# Altium PCB PCB1.PcbDoc
Units mm, origin at the board's own origin, x right, y up, seen from the top; angles counter-clockwise.
Board outline 100 x 50 mm, 2 copper layers (Top Layer, Bottom Layer); 29 components, 29 nets, 93 pads, 32 vias.
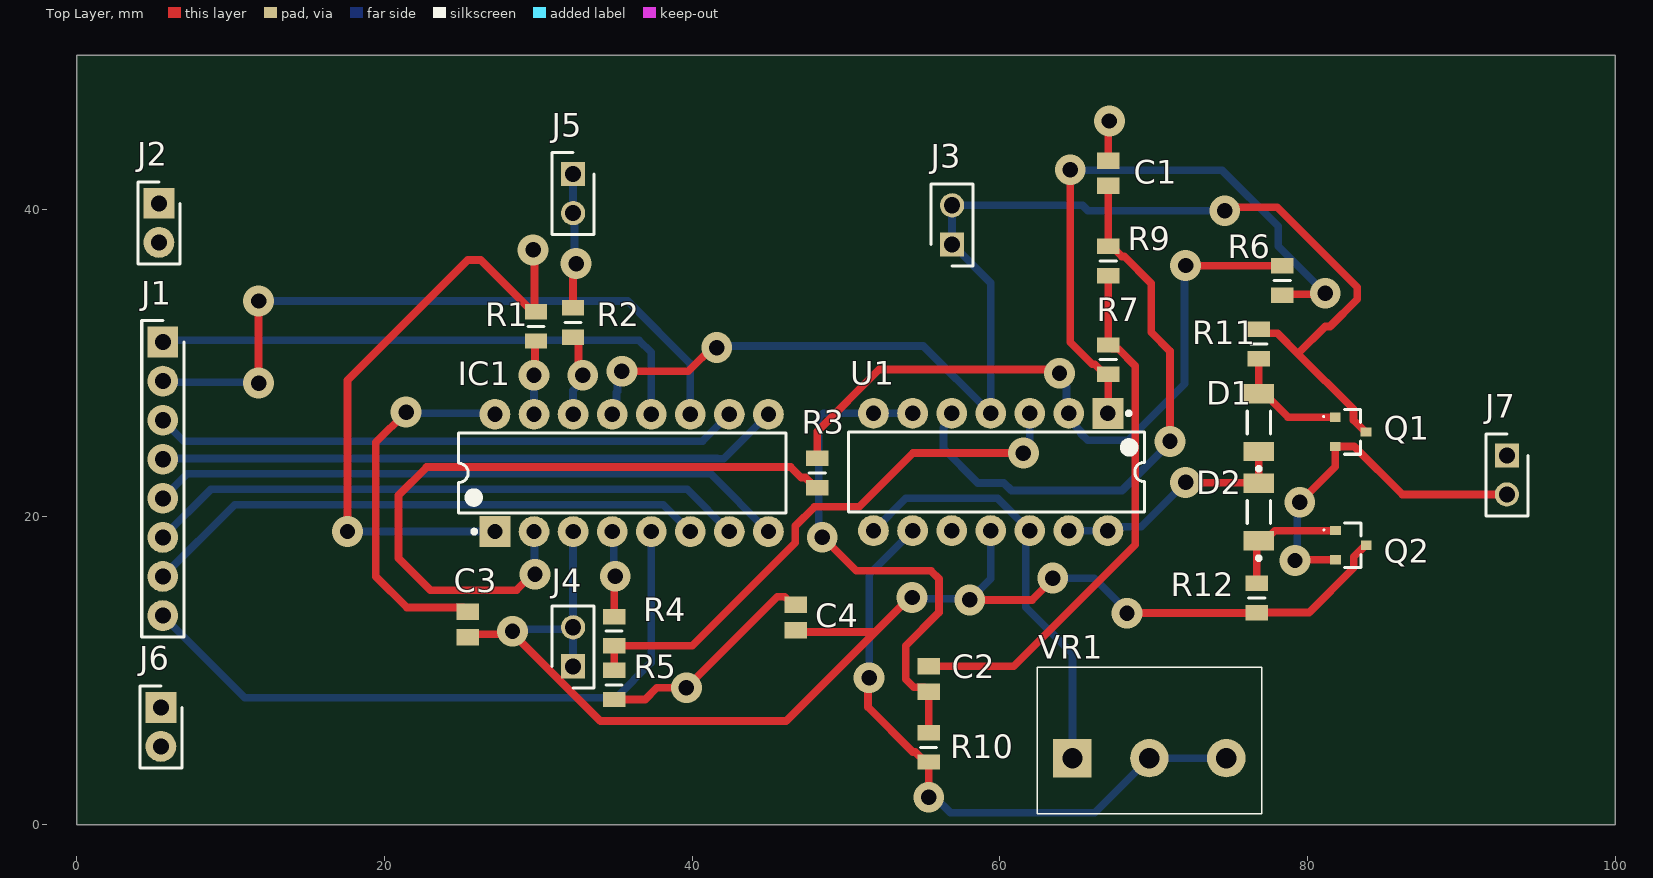
[diagram p0: Top Layer view]
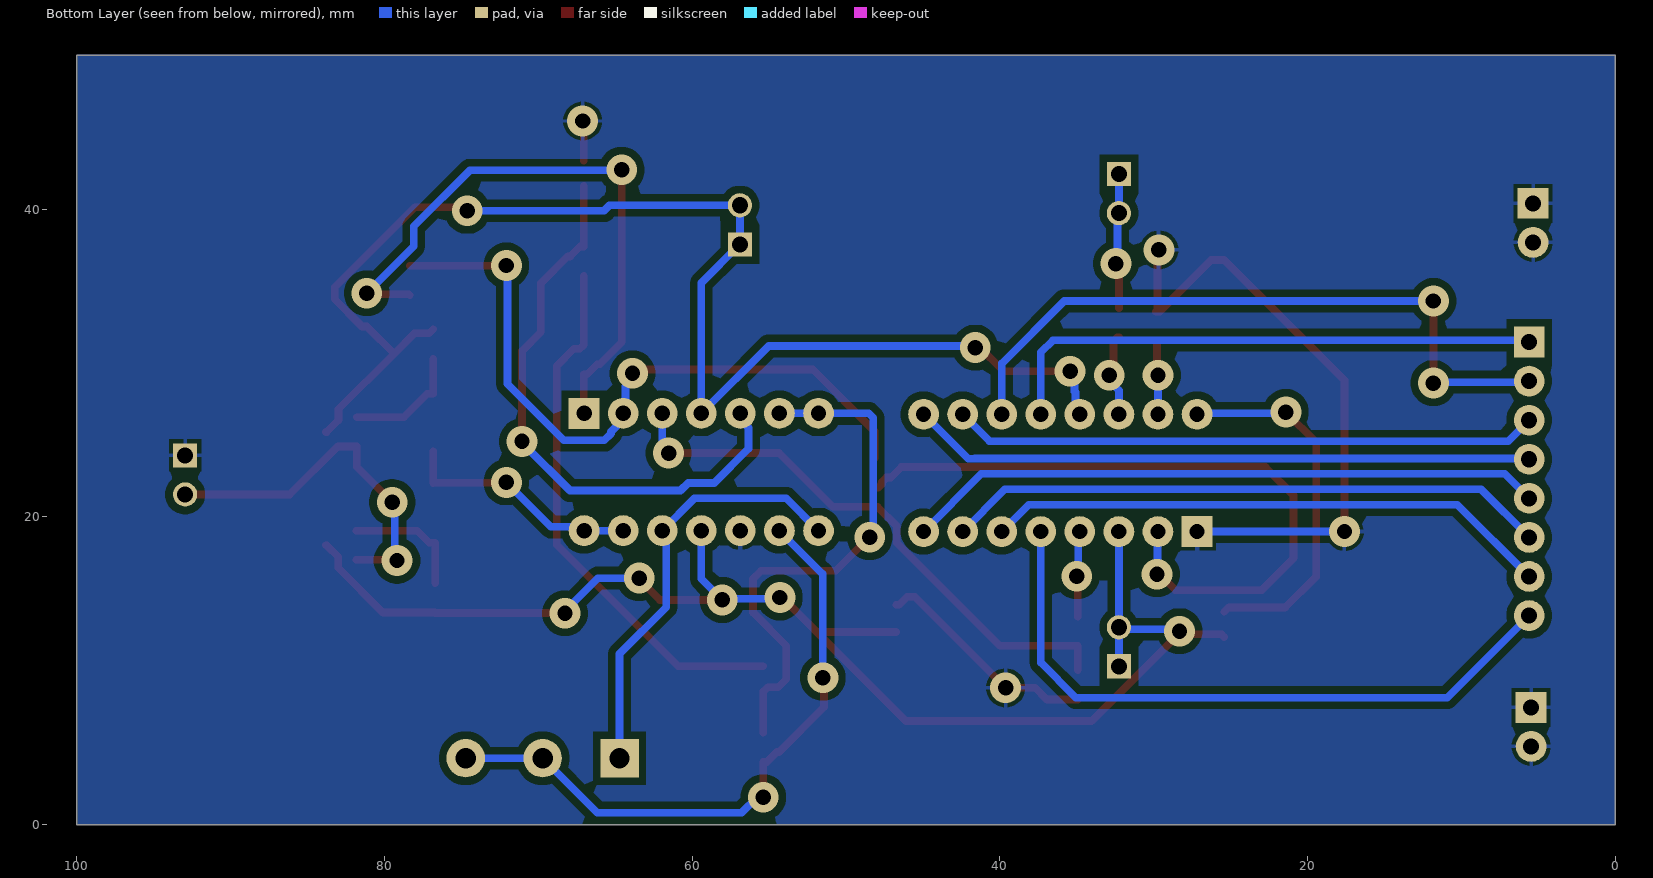
[diagram p1: Bottom Layer view, seen from below]
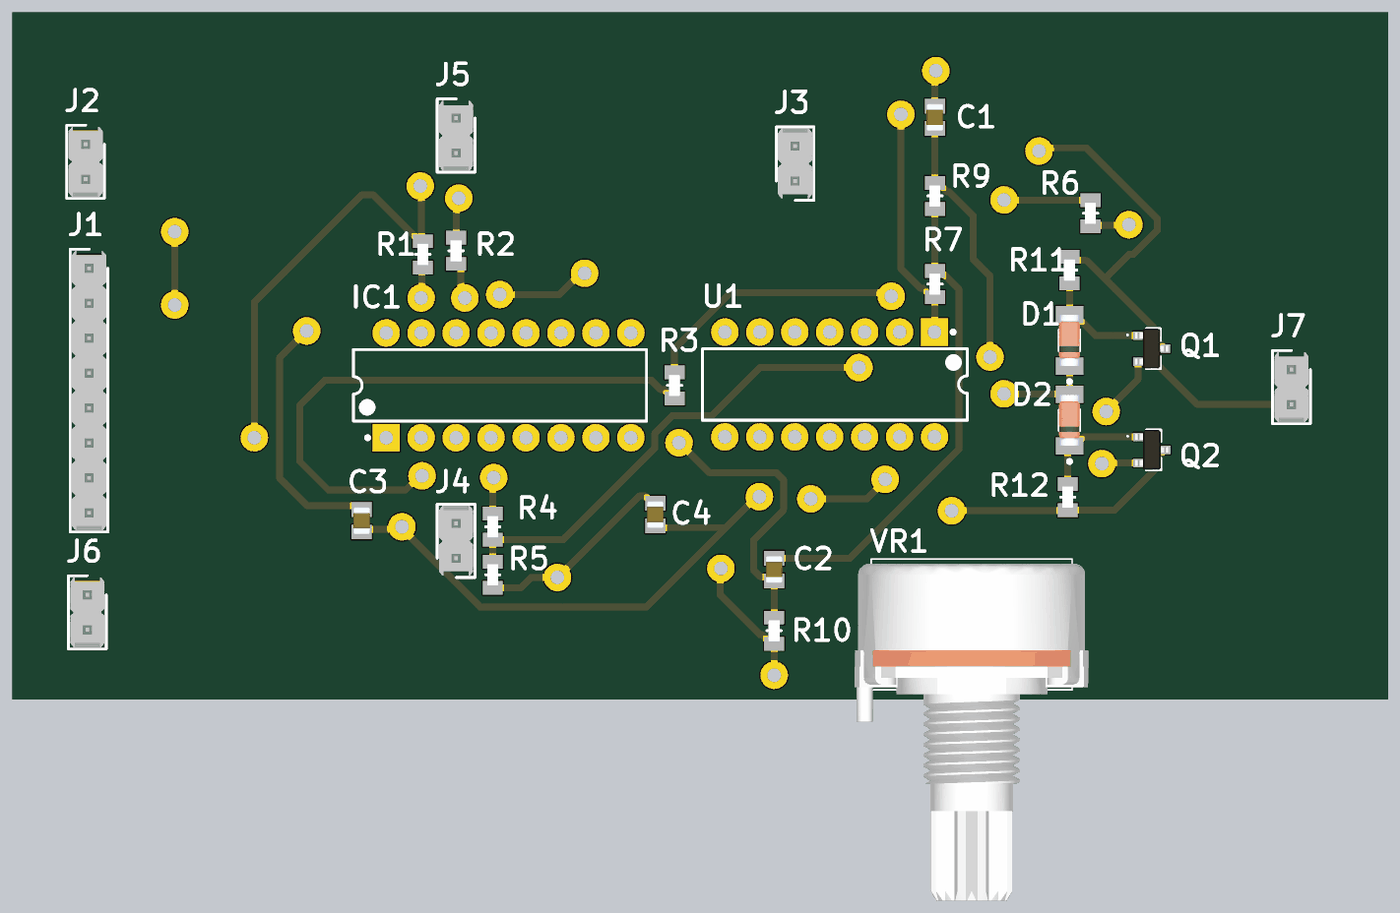
[diagram p2: 3D render of the assembled board from above, using the file's embedded part models]

## Layer stack, top to bottom
Top Solder: solder mask 0.0102, Solder Resist, Dk 3.5
Top Layer: signal copper 0.0356
Dielectric 1: dielectric 0.32, FR-4, Dk 4.8
Bottom Layer: signal copper 0.0356
Bottom Solder: solder mask 0.0102, Solder Resist, Dk 3.5

## Board outline
0,0 0,50 100,50 100,0

## Design rules (kind name [scope] priority, off if disabled: settings)
Clearance [All] p1: gap=0.5 ignorepadtopadclearanceinfootprint=FALSE
PolygonConnect [All] p1: connectstyle=Relief reliefconductorwidth=0.254 reliefentries=4 polygonreliefangle="90 Angle" airgapwidth=0.254
RoutingVias [All] p1: holewidth=1 width=2 viastyle="Through Hole" minholewidth=1 minwidth=2 maxholewidth=1 maxwidth=2
SolderMaskExpansion [All] p1: expansion=0.102 istentingtop=FALSE
SupplyNets "Schematic Supply Nets" [InNet('GND')] p1: voltage=0.000
Width [All] p1: maxlimit=0.5 minlimit=0.5 preferedwidth=0.5
30 further rules are at their usual default settings.

## Components (designator, comment, footprint, x,y, rotation, side; value= is the part's Value field where it differs from the comment)
C1 "0805_CAP" CAPC2012X130N 67.056,42.349 r270 top
C2 "0805_CAP" CAPC2012X130N 55.372,9.467 r90 top
C3 "0805_CAP" CAPC2012X130N 25.4,13.012 r270 top
C4 "0805_CAP" CAPC2012X130N 46.736,13.462 r90 top
D1 "LL4148-GS18" SOD-80 76.835,26.132 r90 top
D2 "LL4148-GS18" SOD-80 76.835,20.32 r90 top
IC1 "DAC0800LCN" DIP16 34.798,22.733 r90 top (schematic designator IC?)
J1 "22-28-4083" HDRV8W87P0X254_1X8_2032X249X863P 5.588,31.369 r270 top
J2 "22-28-4023" HDRV2W87P0X254_1X2_508X249X863P#1 5.334,40.386 r270 top
J3 "22-28-4023" HDRV2W87P0X254_1X2_508X249X863P#2 56.896,37.719 r90 top
J4 "22-28-4023" HDRV2W87P0X254_1X2_508X249X863P#2 32.258,10.287 r90 top
J5 "22-28-4023" HDRV2W87P0X254_1X2_508X249X863P#2 32.258,42.291 r270 top
J6 "22-28-4023" HDRV2W87P0X254_1X2_508X249X863P#1 5.461,7.62 r270 top
J7 "22-28-4023" HDRV2W87P0X254_1X2_508X249X863P#2 92.964,24.003 r270 top
Q1 "BC847" BC857215 82.804,25.527 r270 top
Q2 "BC857" BC857215 82.82,18.161 r270 top
R1 "0805_501" RESC2012X65N 29.845,32.385 r270 top
R2 "0805_501" RESC2012X65N 32.258,32.639 r270 top
R3 "0805_501" RESC2012X65N 48.133,22.86 r90 top
R4 "0805_501" RESC2012X65N 34.925,12.573 r270 top
R5 "0805_501" RESC2012X65N 34.925,9.083 r90 top
R6 "0805_501" RESC2012X65N 78.359,35.372 r90 top
R7 "0805_501" RESC2012X65N 67.056,30.226 r270 top
R9 "0805_501" RESC2012X65N 67.056,36.637 r270 top
R10 "0805_501" RESC2012X65N 55.372,5.019 r90 top
R11 "0805_501" RESC2012X65N 76.835,31.242 r270 top
R12 "0805_501" RESC2012X65N 76.708,14.732 r270 top
U1 "TL074MJ" DIP14 59.309,22.987 r270 top
VR1 "PDB181-K215K-104B" PDB181K220K104B 64.723,4.318 r270 top

## Footprints (in the part's own frame and the unit in brackets; to place one, negate y for a bottom-side part, rotate by r counter-clockwise, add the part's x,y. Pads: shape width x height; smd on the part's side, far side on the other; paste and mask are expansions set on the pad)
BC857215 [mm]
  rect 0.6x0.7 smd: 1(-0.95,-1) 2(0.95,-1) 3(0,1)
  silkscreen extent -1.45,-1.8 1.45,0.65, body extent -1.45,-1.2 1.45,1.2, height 0.95
CAPC2012X130N [mm]
  rect 1.07x1.47 smd: 1(-0.82,0) 2(0.82,0)
  body extent -1,-0.63 1,0.63, height 1.3
DIP14 [mm]
  rect 2x2 hole 1: 1(-3.745,7.718)
  round 2 hole 1: 2(-3.745,5.178) 3(-3.745,2.638) 4(-3.745,0.098) 5(-3.745,-2.442) 6(-3.745,-4.982) 7(-3.745,-7.522) 8(3.875,-7.522) 9(3.875,-4.982) 10(3.875,-2.442) 11(3.875,0.098) 12(3.875,2.638) 13(3.875,5.178) 14(3.875,7.718)
  silkscreen extent -3.87,-9.14 2.66,10.1, body extent -3.9,-9.02 4.02,10.07, height 5.08
DIP16 [mm]
  rect 2x2 hole 1: 1(-3.683,7.62)
  round 2 hole 1: 2(-3.683,5.08) 3(-3.683,2.54) 4(-3.683,0) 5(-3.683,-2.54) 6(-3.683,-5.08) 7(-3.683,-7.62) 8(-3.683,-10.16) 9(3.937,-10.16) 10(3.937,-7.62) 11(3.937,-5.08) 12(3.937,-2.54) 13(3.937,0) 14(3.937,2.54) 15(3.937,5.08) 16(3.937,7.62)
  silkscreen extent -3.81,-11.3 2.73,10, body extent -3.83,-11.3 4.09,9.97, height 5.08
HDRV2W87P0X254_1X2_508X249X863P#1 [mm]
  rect 2x2 hole 1.05: 1(0,0)
  round 2 hole 1.05: 2(2.54,0)
  silkscreen extent -1.4,-1.37 3.94,1.37, body extent -1.27,-1.24 3.81,1.24, height 8.38
HDRV2W87P0X254_1X2_508X249X863P#2 [mm]
  rect 1.575x1.575 hole 1.05: 1(0,0)
  round 1.575 hole 1.05: 2(2.54,0)
  silkscreen extent -1.4,-1.37 3.94,1.37, body extent -1.27,-1.24 3.81,1.24, height 8.38
HDRV8W87P0X254_1X8_2032X249X863P [mm]
  rect 2x2 hole 1.05: 1(0,0)
  round 2 hole 1.05: 2(2.54,0) 3(5.08,0) 4(7.62,0) 5(10.16,0) 6(12.7,0) 7(15.24,0) 8(17.78,0)
  silkscreen extent -1.4,-1.37 19.18,1.37, body extent -1.27,-1.24 19.05,1.24, height 8.38
PDB181K220K104B [mm]
  rect 2.5x2.5 hole 1.32: 1(0,0)
  round 2.5 hole 1.32: 2(0,5) 3(0,10)
  silkscreen extent -5.9,-2.3 3.6,12.3, body extent -5.58,-3.5 18.92,13.49, height 21.2
RESC2012X65N [mm]
  rect 1x1.45 smd: 1(-0.95,0) 2(0.95,0)
  silkscreen extent 0,-0.53 0,0.53, body extent -0.77,-0.4 0.77,0.4, height 0.46
SOD-80 [mm]
  rect 1.25x2 smd: 1(-1.875,0) 2(1.875,0)
  silkscreen extent -3.12,-0.75 0.75,0.75, body extent -1.85,-0.78 1.85,0.78, height 1.6

## Part data
D1 D2: "Diode", Manufacturer_Name=Vishay, Mouser Part Number=78-LL4148-GS18, Arrow Part Number=LL4148-GS18, Arrow Price/Stock=https://www.arrow.com/en/products/ll4148-gs18/vishay.html?utm_currency=USD&region=europe, Datasheet Link=https://www.vishay.com/docs/85557/ll4148.pdf, Manufacturer_Part_Number=LL4148-GS18, Mouser Price/Stock=https://www.mouser.co.uk/ProductDetail/Vishay-Semiconductors/LL4148-GS18?qs=YkIJFe%252BtFEUsKqcD4T1jvg%3D%3D
IC1: "Integrated Circuit", Manufacturer_Name="Texas Instruments", Mouser Part Number=926-DAC0800LCN, Datasheet Link=https://www.ti.com/lit/ds/symlink/dac0800.pdf, Height=4.318mm, Manufacturer_Part_Number=DAC0800LCN, Mouser Price/Stock=https://www.mouser.co.uk/ProductDetail/Texas-Instruments/DAC0800LCN?qs=7X5t%252BdzoRHAPBuJSmu%2FDTw%3D%3D
J1: "Connector", Manufacturer_Name=Molex, Mouser Part Number=538-22-28-4083, Datasheet Link=https://componentsearchengine.com/Datasheets/1/22-28-4083.pdf, Height=8.63mm, Manufacturer_Part_Number=22-28-4083, Mouser Price/Stock=https://www.mouser.co.uk/ProductDetail/Molex/22-28-4083?qs=d9fIA1aNikQMlX6q%252Bcx1qQ%3D%3D
J2 J3 J4 J5 J6 J7: "Connector", Manufacturer_Name=Molex, Mouser Part Number=538-22-28-4023, Datasheet Link=http://www.molex.com/molex/products/datasheet.jsp?part=active/0022284023_PCB_HEADERS.xml, Height=8.63mm, Manufacturer_Part_Number=22-28-4023, Mouser Price/Stock=https://www.mouser.co.uk/ProductDetail/Molex/22-28-4023?qs=MuwpYaHj750gid5X5P2KgQ%3D%3D
U1: library part TL074, "High Speed Low-Noise JFET-Input Quad Operational Amplifier, -55 to 125 degC, 14-pin DIP (J14)", Manufacturer="Texas Instruments", CMRR(Min)(dB)=80, ComponentLink1Description="Manufacturer URL", ComponentLink1URL=http://www.ti.com/, ComponentLink2Description=Datasheet, ComponentLink2URL=http://www.ti.com/lit/ds/symlink/tl074m.pdf, ComponentLink3Description="Package Specification", ComponentLink3URL=http://www.ti.com/litv/pdf/mcer002d, DatasheetVersion=SLOS080J, IIB(Max)(pA)=200, Mounting Technology="Through Hole", PackageDescription="14-Pin Ceramic, Glass In-Line, Row Spacing 7.62 mm, Pitch 2.54 mm", PackageReference=J0014A, PackageVersion="4040083/F, 03/2003", PartNumber=TL074MJ, Slew Rate(Typ)(V/us)=13, Sub Family="General Purpose Amplifier", Vio (25C)(Max)(mV)=9
VR1: "Variable Resistor", Manufacturer_Name=Bourns, Mouser Part Number=652-PDB181-K215K104B, Datasheet Link=https://www.mouser.com/datasheet/2/54/PDB18-1013655.pdf, Height=16.5mm, Manufacturer_Part_Number=PDB181-K215K-104B, Mouser Price/Stock=https://www.mouser.co.uk/ProductDetail/Bourns/PDB181-K215K-104B?qs=gZXFycFWdAN%2FSIUM%252BvBwGA%3D%3D

## Via types
v1: diameter 2, hole 1, Top Layer to Bottom Layer, 32 vias

## Nets (pads, with @x,y where several pads share a name; then routed paths per layer and width w, separated by ;. In a path a pad name is that pad's centre, name@x,y a point inside that pad or via, vN(x,y) a via of type N, cw(c..) or ccw(c..) an arc to the next point about the centre after c; other vN are vias at no path point)
GND: C1.1 C4.2 IC1.1 J2.1 J2.2 J6.1 J6.2 J7.1 R1.1 R5.1 U1.10 | length 57.5
  Top Layer w0.5: v1(17.593,19.05) 17.593,28.896 25.4,36.703 26.252,36.703 29.62,33.335 R1.1 29.752,33.428 29.752,37.265 v1(29.658,37.359) ; R5.1 36.952,8.133 37.709,8.89 v1(39.624,8.89) 45.544,14.81 46.008,14.81 46.536,14.282 C4.2 ; C1.1 v1@67.056,45.466
  Bottom Layer w0.5: v1(17.593,19.05) IC1.1
  other v1: 67.123,45.741
NetC1_2: C1.2 R9.1 U1.5 | length 37.9
  Top Layer w0.5: C1.2 R9.1 67.281,37.587 67.931,36.937 68.092,36.937 69.85,35.179 69.85,31.997 71.06,30.787 v1(71.06,24.913)
  Bottom Layer w0.5: U1.5 56.867,26.326 56.342,25.801 56.342,24.43 58.563,22.209 60.265,22.209 60.757,21.717 67.945,21.717 v1@70.866,24.638
NetC2_1: C2.1 R10.2 U1.6 U1.7 | length 34.7
  Top Layer w0.5: v1(48.458,18.686) 48.497,18.686 50.673,16.51 55.522,16.51 56.046,15.985 56.046,13.793 53.887,11.634 53.887,9.441 54.396,8.932 55.087,8.932 C2.1 R10.2
  Bottom Layer w0.5: v1(48.458,18.686) 48.23,18.914 48.23,26.439 48.523,26.732 U1.7 U1.6
NetC2_2: C2.2 R7.1 R9.2 | length 35.2
  Top Layer w0.5: C2.2 60.895,10.287 68.806,18.198 68.806,29.812 67.692,30.926 67.306,30.926 R7.1 R9.2
NetC3_1: C3.1 IC1.16 | length 24.3
  Top Layer w0.5: v1(21.403,26.818) 19.431,24.845 19.431,16.129 21.443,14.117 25.115,14.117 C3.1
  Bottom Layer w0.5: v1(21.403,26.818) 21.477,26.744 27.104,26.744 IC1.16
NetC3_2: C3.2 C4.1 IC1.3 J4.1 J4.2 Q2.3 R12.2 U1.11 | length 91.5
  Top Layer w0.5: C3.2 25.59,12.383 28.13,12.383 v1(28.321,12.573) 28.321,12.451 34.041,6.731 46.101,6.731 51.885,12.515 ; C4.1@46.736,12.515 51.885,12.515 ; v1(54.296,14.76) 54.13,14.76 51.885,12.515 ; v1(58.039,14.605) 62.103,14.605 v1@63.5,16.002 ; v1(68.266,13.737) 68.289,13.759 76.685,13.759 R12.2 80.102,13.782 83.013,16.693 83.013,17.404 83.77,18.161 Q2.3
  Bottom Layer w0.5: v1(28.321,12.573) 28.448,12.7 32.131,12.7 J4.2 ; J4.1 J4.2 ; IC1.3 J4.2 ; v1@54.326,14.79 v1(54.296,14.76) 54.374,14.683 57.961,14.683 v1(58.039,14.605) 59.407,15.973 U1.11 ; v1(63.44,16.023) 66.146,16.023 68.326,13.843 v1@68.453,13.843
NetD1_1: D1.1 D2.2 U1.13 U1.14 | length 15.7
  Top Layer w0.5: v1(72.076,22.246) 72.101,22.22 76.81,22.22 D2.2 D1.1
  Bottom Layer w0.5: U1.13 U1.14 67.268,19.353 69.183,19.353 v1(72.076,22.246)
NetD1_2: D1.2 Q1.1 R11.2 | length 7.9
  Top Layer w0.5: R11.2 D1.2 77.21,28.007 78.74,26.477 Q1.1
NetD2_1: D2.1 Q2.1 R12.1 | length 8.1
  Top Layer w0.5: R12.1 76.708,18.318 77.083,18.318 77.876,19.111 Q2.1
NetIC?_2: IC1.2 R3.1 | length 45.6
  Top Layer w0.5: v1@29.718,16.383 28.575,15.24 22.987,15.24 20.908,17.319 20.908,21.416 22.733,23.241 46.416,23.241 47.097,22.56 47.365,22.56 47.658,22.267 47.658,22.16 47.908,21.91 R3.1
  Bottom Layer w0.5: IC1.2 29.752,19.016 29.752,16.31 v1(29.785,16.277)
NetIC?_4: IC1.4 R4.1 | length 5.2
  Top Layer w0.5: R4.1 v1@34.925,15.748
  Bottom Layer w0.5: IC1.4 34.895,18.953 34.895,16.247 v1(34.992,16.15)
NetIC?_5: IC1.5 J1.8 | length 43.4
  Bottom Layer w0.5: J1.8 10.922,8.255 35.052,8.255 37.338,10.541 IC1.5
NetIC?_6: IC1.6 J1.7 | length 36.9
  Bottom Layer w0.5: J1.7 10.259,20.8 38.128,20.8 IC1.6
NetIC?_7: IC1.7 J1.6 | length 39.3
  Bottom Layer w0.5: J1.6 8.719,21.8 39.668,21.8 IC1.7
NetIC?_8: IC1.8 J1.5 | length 41.6
  Bottom Layer w0.5: J1.5 7.179,22.8 41.208,22.8 IC1.8
NetIC?_9: IC1.9 J1.4 | length 40.6
  Bottom Layer w0.5: J1.4 5.639,23.8 41.622,23.8 41.648,23.774 42.062,23.774 IC1.9
NetIC?_10: IC1.10 J1.3 | length 38.1
  Bottom Layer w0.5: J1.3 6.957,24.92 40.668,24.92 IC1.10
NetIC?_11: IC1.11 J1.2 | length 44.7
  Top Layer w0.5: v1(11.811,28.702) v1(11.811,34.036)
  Bottom Layer w0.5: J1.2 5.651,28.765 11.747,28.765 v1(11.811,28.702) ; v1(11.811,34.036) 35.814,34.036 39.878,29.972 IC1.11
NetIC?_12: IC1.12 J1.1 | length 36.2
  Bottom Layer w0.5: J1.1 5.715,31.496 36.537,31.496 37.338,30.695 IC1.12
NetIC?_13: IC1.13 J3.1 J3.2 Q1.3 R11.1 U1.4 | length 89
  Top Layer w0.5: v1(35.433,29.464) 39.751,29.464 v1@41.402,31.115 ; v1@74.803,40.132 78.04,40.132 83.232,34.94 83.232,34.148 81.464,32.38 81.148,32.38 79.38,30.612 ; R11.1 77.085,31.942 78.05,31.942 79.38,30.612 ; Q1.3 83.754,25.527 82.997,26.284 82.997,26.995 79.38,30.612
  Bottom Layer w0.5: IC1.13 35.085,26.957 35.085,28.1 35.146,28.161 35.146,29.177 v1(35.433,29.464) ; v1@41.402,31.115 55.025,31.115 U1.4 59.407,35.208 J3.1 56.896,40.132 56.769,40.259 J3.2 65.375,40.259 65.735,39.899 v1(74.616,39.899)
  other v1: 41.596,31.009
NetIC?_14: IC1.14 R2.2 | length 5.6
  Top Layer w0.5: R2.2 32.356,31.689 32.606,31.439 32.606,29.497 v1(32.893,29.21)
  Bottom Layer w0.5: IC1.14 32.258,28.224 32.893,28.859 v1(32.893,29.21)
NetIC?_15: IC1.15 R1.2 | length 4.3
  Top Layer w0.5: v1(29.718,29.21) 29.781,29.273 29.781,31.371 R1.2
  Bottom Layer w0.5: IC1.15 v1@29.718,28.702
NetJ5_1: J5.1 J5.2 R2.1 | length 8.4
  Top Layer w0.5: R2.1 v1@32.258,36.068
  Bottom Layer w0.5: J5.1 J5.2 32.355,39.654 32.355,36.567 v1(32.452,36.47)
NetJ7_2: J7.2 Q1.2 Q2.2 | length 23.3
  Top Layer w0.5: v1@79.441,17.211 Q2.2 ; v1(79.502,20.955) 81.804,23.257 Q1.2 83.043,24.577 86.157,21.463 J7.2
  Bottom Layer w0.5: v1(79.188,17.166) 79.345,17.323 79.345,20.798 v1(79.502,20.955)
NetR3_2: R3.2 R6.2 U1.2 | length 46.3
  Top Layer w0.5: R3.2 48.133,25.553 52.171,29.591 63.627,29.591 v1(63.881,29.337) ; v1(72.076,36.343) 72.086,36.332 78.349,36.332 R6.2
  Bottom Layer w0.5: v1(63.881,29.337) 63.881,28.931 64.33,28.482 64.33,26.89 U1.2 64.487,26.326 65.277,25.536 65.277,25.422 65.717,24.982 68.338,24.982 72.009,28.653 v1@72.009,36.449
NetR4_2: R4.2 R5.2 U1.3 | length 36.8
  Top Layer w0.5: R5.2 R4.2 40.006,11.623 46.708,18.325 46.708,19.411 47.957,20.66 50.86,20.66 54.351,24.151 v1(61.535,24.151)
  Bottom Layer w0.5: v1@61.595,24.13 61.947,24.482 U1.3
NetR6_1: R6.1 R7.2 U1.1 | length 40.5
  Top Layer w0.5: v1(64.583,42.566) 64.583,31.363 66.02,29.926 66.181,29.926 66.831,29.276 R7.2 67.056,26.761 U1.1 ; R6.1 78.42,34.483 81.092,34.483 v1(81.153,34.544)
  Bottom Layer w0.5: v1@64.643,42.545 74.444,42.545 78.103,38.886 78.103,37.594 v1(81.153,34.544)
NetR10_1: R10.1 U1.9 VR1.2 VR1.3 | length 41.6
  Top Layer w0.5: v1@51.435,9.525 51.435,7.62 54.336,4.719 54.497,4.719 55.147,4.069 R10.1 v1(55.372,1.778)
  Bottom Layer w0.5: v1(51.502,9.546) 51.502,16.287 U1.9 ; v1(55.372,1.778) 55.778,1.778 56.794,0.762 66.167,0.762 VR1.2 VR1.3
NetU1_8: U1.8 U1.12 VR1.1 | length 28.1
  Bottom Layer w0.5: U1.8 53.884,21.209 59.851,21.209 U1.12 61.69,18.855 61.69,14.129 64.723,11.096 VR1.1

## Polygon pours and split planes (outlines as drawn)
GND on Bottom Layer "GND_L02_P000" (solid, pour order 0): 0,0 0,50.038 99.949,50.038 99.949,0